# Altium PCB initial.PcbDoc
Units mil, origin at the board's own origin, x right, y up, seen from the top; angles counter-clockwise.
Board outline 6000 x 4000 mil, 2 copper layers (Top Layer, Bottom Layer); 25 components, 40 nets, 159 pads, 0 vias.
Unrouted connection lines stored in the file: 90.
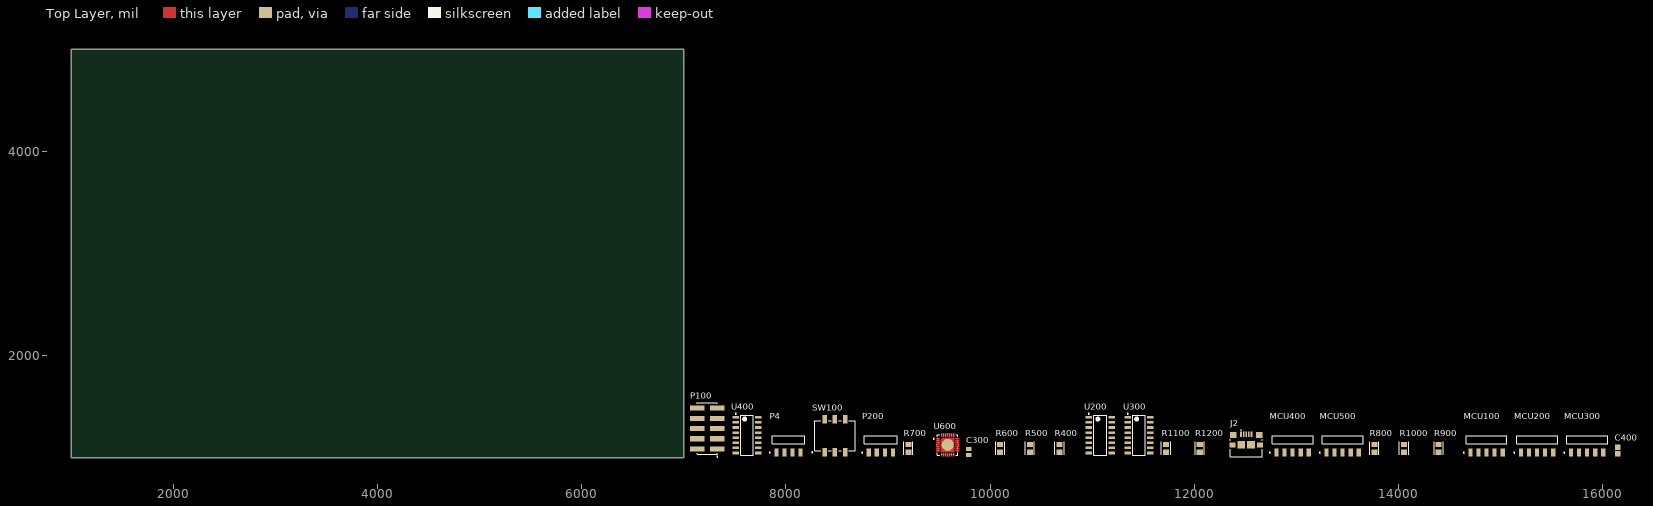
[diagram p0: Top Layer view]
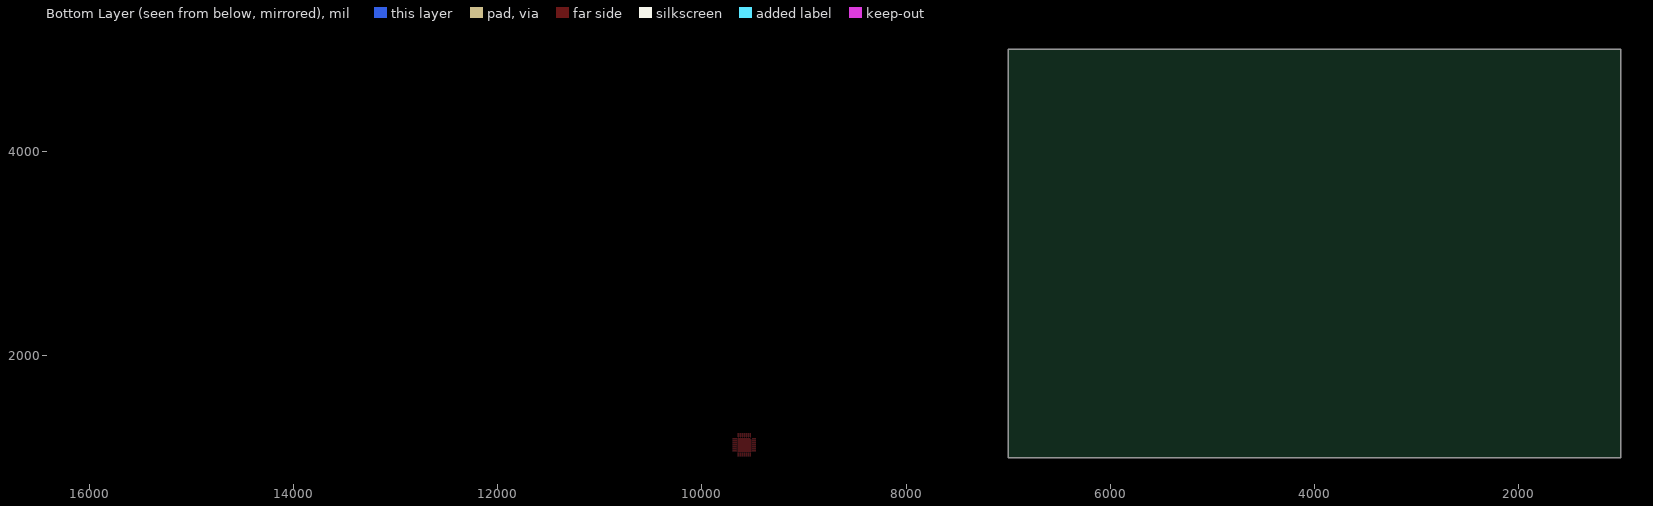
[diagram p1: Bottom Layer view, seen from below]

## Layer stack, top to bottom
Top Solder: solder mask 0.4, Solder Resist, Dk 3.5
Top Layer: signal copper 1.4
Dielectric 1: dielectric 12.6, FR-4, Dk 4.8
Bottom Layer: signal copper 1.4
Bottom Solder: solder mask 0.4, Solder Resist, Dk 3.5

## Board outline
1000,1000 7000,1000 7000,5000 1000,5000

## Design rules (kind name [scope] priority, off if disabled: settings)
Clearance [All] p1: gap=10 ignorepadtopadclearanceinfootprint=FALSE
PolygonConnect [All] p1: connectstyle=Relief reliefconductorwidth=10 reliefentries=4 polygonreliefangle="90 Angle" airgapwidth=10
RoutingVias [All] p1: holewidth=28 width=50 viastyle="Through Hole" minholewidth=28 minwidth=50 maxholewidth=28 maxwidth=50
SolderMaskExpansion [All] p1: expansion=4 istentingtop=FALSE
SupplyNets "Schematic Supply Nets_3" [InNet('+5V')] p1: voltage=0.000
SupplyNets "Schematic Supply Nets_2" [InNet('+5')] p2: voltage=0.000
SupplyNets "Schematic Supply Nets_1" [InNet('+3.3V')] p3: voltage=0.000
SupplyNets "Schematic Supply Nets" [InNet('GND')] p4: voltage=0.000
Width [All] p1: maxlimit=10 minlimit=10 preferedwidth=10
30 further rules are at their usual default settings.

## Components (designator, comment, footprint, x,y, rotation, side; value= is the part's Value field where it differs from the comment)
C300 "100nF" CAPC2013X135X50LL15T20 9790,1055 r90 top
C400 "1uF" CAPC2013X140X50NL20T25 16150,1070 r90 top
J2 "1981568-1" TECO-1981568-5_V 12510,1230 r0 top
MCU100 "MMT-105-01-T-SH" SMTC-MMT-105-01-X-SH 14865,1175 r0 top
MCU200 "MMT-105-01-T-SH" SMTC-MMT-105-01-X-SH 15360,1175 r0 top
MCU300 "MMT-105-01-T-SH" SMTC-MMT-105-01-X-SH 15850,1175 r0 top
MCU400 "MMT-105-01-T-SH" SMTC-MMT-105-01-X-SH 12965,1175 r0 top
MCU500 "MMT-105-01-T-SH" SMTC-MMT-105-01-X-SH 13455,1175 r0 top
P4 "MMT-104-01-T-SH" SMTC-MMT-104-01-X-SH 8025,1175 r0 top
P100 "TSM-105-01-L-DV" SMTC-TSM-105-01-X-DV 7230,1285 r90 top
P200 "MMT-104-01-T-SH" SMTC-MMT-104-01-X-SH 8930,1175 r0 top
R400 "10k" FP-CRGP0805-IPC_A 10680,1090 r90 top value=10KΩ
R500 "10k" FP-CRGP0805-IPC_A 10390,1090 r90 top value=10KΩ
R600 "10k" FP-CRGP0805-IPC_A 10100,1090 r90 top value=10KΩ
R700 "10k" FP-CRGP0805-IPC_A 9200,1090 r90 top value=10KΩ
R800 "10k" FP-CRGP0805-IPC_A 13765,1090 r90 top value=10KΩ
R900 "10k" FP-CRGP0805-IPC_A 14395,1090 r90 top value=10KΩ
R1000 "10k" FP-CRGP0805-IPC_A 14055,1090 r90 top value=10KΩ
R1100 "10k" FP-CRGP0805-IPC_A 11725,1090 r90 top value=10KΩ
R1200 "10k" FP-CRGP0805-IPC_A 12055,1090 r90 top value=10KΩ
SW100 "A6SN-3101" FP-A6SN-3101-MFG 8480,1215 r0 top
U200 "CD74HC4051M96" D0016A_M 11080,1220 r0 top
U300 "CD74HC4051M96" D0016A_M 11460,1220 r0 top
U400 "CD74HC4051M96" D0016A_M 7620,1220 r0 top
U600 "CP2102N-A02-GQFN28" FP-CP2102N-A02-GQFN28-MFG 9585,1125 r0 top

## Footprints (in the part's own frame and the unit in brackets; to place one, negate y for a bottom-side part, rotate by r counter-clockwise, add the part's x,y. Pads: shape width x height; smd on the part's side, far side on the other; paste and mask are expansions set on the pad)
CAPC2013X135X50LL15T20 [mm] "Chip Capacitor, 2-Leads, Body 2.00x1.25mm, IPC High Density"
  rect 1.05x1.35 smd: 1(-0.75,0) 2(0.75,0)
  body extent -1.08,-0.7 1.07,0.7, height 1.35
CAPC2013X140X50NL20T25 [mm] "Chip Capacitor, 2-Leads, Body 2.00x1.25mm, IPC Medium Density"
  rect 1.3x1.45 smd: 1(-0.8,0) 2(0.8,0)
  body extent -1.1,-0.72 1.1,0.72, height 1.4
D0016A_M [mm] "SOIC, 16-Leads, Body 10x4mm, Pitch 1.27mm, IPC Low Density"
  rrect15% 1.65x0.65 smd: 1(-2.825,4.445) 2(-2.825,3.175) 3(-2.825,1.905) 4(-2.825,0.635) 5(-2.825,-0.635) 6(-2.825,-1.905) 7(-2.825,-3.175) 8(-2.825,-4.445) 9(2.825,-4.445) 10(2.825,-3.175) 11(2.825,-1.905) 12(2.825,-0.635) 13(2.825,0.635) 14(2.825,1.905) 15(2.825,3.175) 16(2.825,4.445)
  silkscreen extent -2.95,-5 1.6,5.44, body extent -3,-4.95 3,4.95, height 1.59
FP-A6SN-3101-MFG [mm]
  rect 1.1x2.15 smd paste+0 mask+0: 1(-2.54,-4.125) 2(0,-4.125) 3(2.54,-4.125) 4(2.54,4.125) 5(0,4.125) 6(-2.54,4.125)
  silkscreen extent -5.77,-4.25 5.05,3.75, body extent -5.15,-5.3 5.15,5.3, height 0.25
FP-CP2102N-A02-GQFN28-MFG [mm]
  round 0.27 smd paste+0 mask+0: 1(-2.4,1.5) 2(-2.4,1) 3(-2.4,0.5) 4(-2.725,0) 5(-2.4,-0.5) 6(-2.4,-1) 7(-2.4,-1.5) 8(-1.5,-2.4) 9(-1,-2.4) 10(-0.5,-2.4) 11(0,-2.725) 12(0.5,-2.4) 13(1,-2.4) 14(1.5,-2.4) 15(2.4,-1.5) 16(2.4,-1) 17(2.4,-0.5) 18(2.675,0) 19(2.4,0.5) 20(2.4,1) 21(2.4,1.5) 22(1.5,2.4) 23(1,2.4) 24(0.5,2.4) 25(0,2.675) 26(-0.5,2.4) 27(-1,2.4) 28(-1.5,2.4)
  round 3.015 smd paste-1000 mask+0: 29(0,0)
  Top Layer region: -1.675,1.325 -1.325,1.675 1.675,1.675 1.675,-1.675 -1.675,-1.675 -1.675,1.325
  Top Layer region: -1.35,2.875 -1.35,2.075 -1.361,2.018 -1.394,1.969 -1.443,1.936 -1.5,1.925 -1.5,1.925 -1.557,1.936 -1.606,1.969 -1.639,2.018 -1.65,2.075 -1.65,2.075 -1.65,2.875
  Top Layer region: -0.85,2.875 -0.85,2.075 -0.861,2.018 -0.894,1.969 -0.943,1.936 -1,1.925 -1,1.925 -1.057,1.936 -1.106,1.969 -1.139,2.018 -1.15,2.075 -1.15,2.075 -1.15,2.875
  Top Layer region: -0.35,2.875 -0.35,2.075 -0.361,2.018 -0.394,1.969 -0.443,1.936 -0.5,1.925 -0.5,1.925 -0.557,1.936 -0.606,1.969 -0.639,2.018 -0.65,2.075 -0.65,2.075 -0.65,2.875
  Top Layer region: 0.15,2.875 0.15,2.075 0.139,2.018 0.106,1.969 0.057,1.936 0,1.925 0,1.925 -0.057,1.936 -0.106,1.969 -0.139,2.018 -0.15,2.075 -0.15,2.075 -0.15,2.875
  Top Layer region: 0.65,2.875 0.65,2.075 0.639,2.018 0.606,1.969 0.557,1.936 0.5,1.925 0.5,1.925 0.443,1.936 0.394,1.969 0.361,2.018 0.35,2.075 0.35,2.075 0.35,2.875
  Top Layer region: 1.15,2.875 1.15,2.075 1.139,2.018 1.106,1.969 1.057,1.936 1,1.925 1,1.925 0.943,1.936 0.894,1.969 0.861,2.018 0.85,2.075 0.85,2.075 0.85,2.875
  Top Layer region: 1.65,2.875 1.65,2.075 1.639,2.018 1.606,1.969 1.557,1.936 1.5,1.925 1.5,1.925 1.443,1.936 1.394,1.969 1.361,2.018 1.35,2.075 1.35,2.075 1.35,2.875
  Top Layer region: 1.35,-2.875 1.35,-2.075 1.361,-2.018 1.394,-1.969 1.443,-1.936 1.5,-1.925 1.5,-1.925 1.557,-1.936 1.606,-1.969 1.639,-2.018 1.65,-2.075 1.65,-2.075 1.65,-2.875
  Top Layer region: 0.85,-2.875 0.85,-2.075 0.861,-2.018 0.894,-1.969 0.943,-1.936 1,-1.925 1,-1.925 1.057,-1.936 1.106,-1.969 1.139,-2.018 1.15,-2.075 1.15,-2.075 1.15,-2.875
  Top Layer region: 0.35,-2.875 0.35,-2.075 0.361,-2.018 0.394,-1.969 0.443,-1.936 0.5,-1.925 0.5,-1.925 0.557,-1.936 0.606,-1.969 0.639,-2.018 0.65,-2.075 0.65,-2.075 0.65,-2.875
  Top Layer region: -0.15,-2.875 -0.15,-2.075 -0.139,-2.018 -0.106,-1.969 -0.057,-1.936 0,-1.925 0,-1.925 0.057,-1.936 0.106,-1.969 0.139,-2.018 0.15,-2.075 0.15,-2.075 0.15,-2.875
  Top Layer region: -0.65,-2.875 -0.65,-2.075 -0.639,-2.018 -0.606,-1.969 -0.557,-1.936 -0.5,-1.925 -0.5,-1.925 -0.443,-1.936 -0.394,-1.969 -0.361,-2.018 -0.35,-2.075 -0.35,-2.075 -0.35,-2.875
  Top Layer region: -1.15,-2.875 -1.15,-2.075 -1.139,-2.018 -1.106,-1.969 -1.057,-1.936 -1,-1.925 -1,-1.925 -0.943,-1.936 -0.894,-1.969 -0.861,-2.018 -0.85,-2.075 -0.85,-2.075 -0.85,-2.875
  Top Layer region: -1.65,-2.875 -1.65,-2.075 -1.639,-2.018 -1.606,-1.969 -1.557,-1.936 -1.5,-1.925 -1.5,-1.925 -1.443,-1.936 -1.394,-1.969 -1.361,-2.018 -1.35,-2.075 -1.35,-2.075 -1.35,-2.875
  Top Layer region: 2.875,1.35 2.075,1.35 2.018,1.361 1.969,1.394 1.936,1.443 1.925,1.5 1.925,1.5 1.936,1.557 1.969,1.606 2.018,1.639 2.075,1.65 2.075,1.65 2.875,1.65
  Top Layer region: 2.875,0.85 2.075,0.85 2.018,0.861 1.969,0.894 1.936,0.943 1.925,1 1.925,1 1.936,1.057 1.969,1.106 2.018,1.139 2.075,1.15 2.075,1.15 2.875,1.15
  Top Layer region: 2.875,0.35 2.075,0.35 2.018,0.361 1.969,0.394 1.936,0.443 1.925,0.5 1.925,0.5 1.936,0.557 1.969,0.606 2.018,0.639 2.075,0.65 2.075,0.65 2.875,0.65
  Top Layer region: 2.875,-0.15 2.075,-0.15 2.018,-0.139 1.969,-0.106 1.936,-0.057 1.925,0 1.925,0 1.936,0.057 1.969,0.106 2.018,0.139 2.075,0.15 2.075,0.15 2.875,0.15
  Top Layer region: 2.875,-0.65 2.075,-0.65 2.018,-0.639 1.969,-0.606 1.936,-0.557 1.925,-0.5 1.925,-0.5 1.936,-0.443 1.969,-0.394 2.018,-0.361 2.075,-0.35 2.075,-0.35 2.875,-0.35
  Top Layer region: 2.875,-1.15 2.075,-1.15 2.018,-1.139 1.969,-1.106 1.936,-1.057 1.925,-1 1.925,-1 1.936,-0.943 1.969,-0.894 2.018,-0.861 2.075,-0.85 2.075,-0.85 2.875,-0.85
  Top Layer region: 2.875,-1.65 2.075,-1.65 2.018,-1.639 1.969,-1.606 1.936,-1.557 1.925,-1.5 1.925,-1.5 1.936,-1.443 1.969,-1.394 2.018,-1.361 2.075,-1.35 2.075,-1.35 2.875,-1.35
  Top Layer region: -2.875,-1.35 -2.075,-1.35 -2.018,-1.361 -1.969,-1.394 -1.936,-1.443 -1.925,-1.5 -1.925,-1.5 -1.936,-1.557 -1.969,-1.606 -2.018,-1.639 -2.075,-1.65 -2.075,-1.65 -2.875,-1.65
  Top Layer region: -2.875,-0.85 -2.075,-0.85 -2.018,-0.861 -1.969,-0.894 -1.936,-0.943 -1.925,-1 -1.925,-1 -1.936,-1.057 -1.969,-1.106 -2.018,-1.139 -2.075,-1.15 -2.075,-1.15 -2.875,-1.15
  Top Layer region: -2.875,-0.35 -2.075,-0.35 -2.018,-0.361 -1.969,-0.394 -1.936,-0.443 -1.925,-0.5 -1.925,-0.5 -1.936,-0.557 -1.969,-0.606 -2.018,-0.639 -2.075,-0.65 -2.075,-0.65 -2.875,-0.65
  Top Layer region: -2.875,0.15 -2.075,0.15 -2.018,0.139 -1.969,0.106 -1.936,0.057 -1.925,0 -1.925,0 -1.936,-0.057 -1.969,-0.106 -2.018,-0.139 -2.075,-0.15 -2.075,-0.15 -2.875,-0.15
  Top Layer region: -2.875,0.65 -2.075,0.65 -2.018,0.639 -1.969,0.606 -1.936,0.557 -1.925,0.5 -1.925,0.5 -1.936,0.443 -1.969,0.394 -2.018,0.361 -2.075,0.35 -2.075,0.35 -2.875,0.35
  Top Layer region: -2.875,1.15 -2.075,1.15 -2.018,1.139 -1.969,1.106 -1.936,1.057 -1.925,1 -1.925,1 -1.936,0.943 -1.969,0.894 -2.018,0.861 -2.075,0.85 -2.075,0.85 -2.875,0.85
  Top Layer region: -2.875,1.65 -2.075,1.65 -2.018,1.639 -1.969,1.606 -1.936,1.557 -1.925,1.5 -1.925,1.5 -1.936,1.443 -1.969,1.394 -2.018,1.361 -2.075,1.35 -2.075,1.35 -2.875,1.35
  silkscreen extent -3.62,-2.55 2.55,2.55, body extent -2.98,-2.98 2.98,2.98, height 0.25
FP-CRGP0805-IPC_A [mil]
  rect 51.42x59.44 smd paste+0 mask+0: 1(-38.43,0) 2(38.43,0)
  silkscreen extent -64,-45 64,45, body extent -84,-49 84,49, height 10
SMTC-MMT-104-01-X-SH [mm] "Terminal Surface Mount Strip ASSEM, 1x4 Pins, Horizontal, 2mm Pitch, Male"
  rect 1.02x2.03 smd: 1(-3,-3.181) 2(-1,-3.181) 3(1,-3.181) 4(3,-3.181)
  silkscreen extent -4.77,-3.31 4.06,0.99, body extent -4,-3.8 4,4.19, height 1.92
SMTC-MMT-105-01-X-SH [mm] "Terminal Surface Mount Strip ASSEM, 1x5 Pins, Horizontal, 2mm Pitch, Male"
  rect 1.02x2.03 smd: 1(-4,-3.181) 2(-2,-3.181) 3(0,-3.181) 4(2,-3.181) 5(4,-3.181)
  silkscreen extent -5.77,-3.31 5.06,0.99, body extent -5,-3.8 5,4.19, height 1.92
SMTC-TSM-105-01-X-DV [mm] "Double Row Gullwing ASM, 2x5 Pins, Vertical, 2.54mm Pitch, Male"
  rect 1.27x3.68 smd: 1(-5.08,-2.475) 2(-5.08,2.475) 3(-2.54,-2.475) 4(-2.54,2.475) 5(0,-2.475) 6(0,2.475) 7(2.54,-2.475) 8(2.54,2.475) 9(5.08,-2.475) 10(5.08,2.475)
  silkscreen extent -7.11,-2.67 6.35,2.54, body extent -6.35,-3.68 6.35,3.68, height 9.65
TECO-1981568-5_V [mm] "SMD, 5-Leads, Body 8x5.9mm, Pitch 0.65mm"
  rect 0.4x1.35 smd: 1(-1.3,0) 2(-0.65,0) 3(0,0) 4(0.65,0) 5(1.3,0)
  rect 1.6x1.4 smd: 6(-3.2,-0.225) 7(3.2,-0.225)
  rect 1.45x1.3 smd: 8(-3.425,-2.675) 9(3.425,-2.675)
  rect 1.9x1.9 smd: 10(-1.2,-2.675) 11(1.2,-2.675)
  silkscreen extent -4,-5.63 4,1.12, body extent -4,-5.63 4,0.28, height 3

## Part data
C300: library part CMP-2007-03441-1, Manufacturer=Vitramon, Part Number=VJ0805Y104KXJCW1BC
C400: library part CMP-2007-04663-1, Manufacturer="AVX Interconnect / Elco", Part Number=0805YD105MAT2A
J2: library part CMP-2000-05408-1, "Micro USB Receptacle Standard Type B Assy, 5-Pin SMD, RoHS, Tape and Reel", Current Rating (Max)=1/ContactA, Manufacturer="TE Connectivity", Operating Temp Range=-55Cto85C, Operating Temperature Max Deg. C=85C, Operating Temperature Min Deg. C=-55C, Voltage Rating Max=30VAC, Body Orientation=RightAngle, Contact Material=CopperAlloy, Contact Plating=GoldOverNickel, Datasheet URL=http://www.mouser.com/ds/2/418/NG_CD_1981568_E2-621296.pdf, Datasheet Version="Rev. E2, 08/2015", Gender=RCP, Housing Material=Thermoplastic, Manufacturer URL=http://www.te.com/, Mounting Style=SurfaceMount, Number of Contacts=5POS, Number of Ports=1Port, Number of Terminals=5, Packaging=TapeandReel, Pitch (mm)=0.65mm, Product Depth (mm)=5.6mm, Product Height (mm)=3mm, Product Length (mm)=8mm, Termination Method=Solder, Type=MicroUSB
MCU100 MCU200 MCU300 MCU400 MCU500: library part CMP-1029-00060-1, "Horizontal Surface Mount Header, -55 to 105 degC, 2 mm Pitch, 5-Pin, Male, RoHS", Manufacturer=Samtec, Temperature Range="-55 to 105 degC", ComponentLink1Description="Manufacturer URL", ComponentLink1URL=http://www.samtec.com, ComponentLink2Description=Datasheet, ComponentLink2URL=http://d2a072wq521u33.cloudfront.net/catalog_english//MMT_SM.PDF, ComponentLink3Description="Package Specification", ComponentLink3URL=http://www.samtec.com/documents/webfiles/cpdf/MMT-1XX-XX-XX-XX-XX-XXX-X-XX-MKT.pdf, DatasheetVersion=F-214, Mounting Technology="Surface Mount", Orientation=Horizontal, PackageDescription="2mm Horizontal Terminal Surface Mount Strip ASSEM", PackageReference=MMT-105-01-X-SH, PackageVersion="CY, 12/2000", PartNumber=MMT-105-01-T-SH, Pitch="2 mm", RoHS=True
P4 P200: library part CMP-1029-00049-1, "Horizontal Surface Mount Header, -55 to 105 degC, 2 mm Pitch, 4-Pin, Male, RoHS", Manufacturer=Samtec, Temperature Range="-55 to 105 degC", ComponentLink1Description="Manufacturer URL", ComponentLink1URL=http://www.samtec.com, ComponentLink2Description=Datasheet, ComponentLink2URL=http://d2a072wq521u33.cloudfront.net/catalog_english//MMT_SM.PDF, ComponentLink3Description="Package Specification", ComponentLink3URL=http://www.samtec.com/documents/webfiles/cpdf/MMT-1XX-XX-XX-XX-XX-XXX-X-XX-MKT.pdf, DatasheetVersion=F-214, Mounting Technology="Surface Mount", Orientation=Horizontal, PackageDescription="2mm Horizontal Terminal Surface Mount Strip ASSEM", PackageReference=MMT-104-01-X-SH, PackageVersion="CY, 12/2000", PartNumber=MMT-104-01-T-SH, Pitch="2 mm", RoHS=True
P100: library part CMP-1024-00233-1, "0.025\" SQ Post Header, Surface Mount, Vertical, -55 to 125 degC, 2.54 mm Pitch, 10-Pin, Male, RoHS", Manufacturer=Samtec, Temperature Range="-55 to 125 degC", ComponentLink1Description="Manufacturer URL", ComponentLink1URL=http://www.samtec.com, ComponentLink2Description=Datasheet, ComponentLink2URL=http://www.samtec.com/documents/webfiles/pdf/TSM.PDF, ComponentLink3Description="Package Specification", ComponentLink3URL=http://www.samtec.com/documents/webfiles/cpdf/TSM-1XX-XX-XXX-XX-X-XXX-X-MKT.pdf, DatasheetVersion=F-214, Mounting Technology="Surface Mount", Orientation=Vertical, PackageDescription="Double Row Gullwing ASM", PackageReference=TSM-105-01-X-DV, PackageVersion="DJ, 4/1991", PartNumber=TSM-105-01-L-DV, Pitch="2.54 mm", RoHS=True
R400 R500 R600 R700 R800 R900 R1000 R1100 R1200: library part CMP-03211-006861-1, "CRGP 0805 10K 1%", Ambient Temperature Range High=+70°C, Manufacturer=TE, Manufacturer Part Number=CRGP0805F10K, Package=CRGP0805, Power Rating=0.33W, Resistance=10KΩ, Temperature="-55°C to +155°C", Temperature Coefficient=±100ppm/°C, Temperature Range High=+155°C, Temperature Range Low=-55°C, Tolerance=0.01, Voltage Rating=150V, Automotive=No, Category=Res, ComponentLink2Description=Datasheet, ComponentLink2URL=https://www.mouser.com/datasheet/2/418/NG_DS_9-1773463-9_A-1358566.pdf, Composition="Thick Film", Device Class L1="Passive Components", Device Class L2=Resistors, Device Class L3="Chip SMD Resistors", Digikey Description="CRGP 0805 10K 1%", Height=0.65mm, Ipc Land Pattern Name=RESC200125X55, Lead Free=Yes, Octopart=https://octopart.com/crgp0805f10k-te+connectivity-91018782, RoHS=TRUE, Series=CRGP
SW100: library part CMP-08827-000007-1, "SWITCH SLIDE DIP SPST 25MA 24V", Ambient Temperature Range High=+85°C, Ambient Temperature Range Low=-30°C, Contact Resistance=200mΩ, Current Rating=25mA, Manufacturer="Omron Electronics Inc-EMC Div", Temperature="-30°C to +85°C", Voltage Rating Dc=24V, Automotive=No, Category=Switch, ComponentLink2Description=Datasheet, ComponentLink2URL=https://omronfs.omron.com/en_US/ecb/products/pdf/en-a6sn.pdf, Device Class L1=Electromechanical, Device Class L2=Switches, Device Class L3="DIP Switches", Digikey Description="SWITCH SLIDE DIP SPST 25MA 24V", Electromechanical Life=1000Cycles, Height=4.55mm, Lead Free=Yes, Manufacturer Part Number=A6SN-3101, Mouser Description="DIP Switches / SIP Switches 3P Knife-Edge, 2.3mm Slide SMT Flat-Act", Number Of Circuits=3, Octopart=https://octopart.com/a6sn-3101-omron-55396000, Package=A6SN-3101, RoHS=TRUE, Standoff Height=0.7mm, Temperature Range High=+85°C, Temperature Range Low=-30°C, Throw Configuration=SPST
U200 U300 U400: library part CMP-1575-00036-4, "High Speed CMOS 8-Channel Analog Multiplexer/Demultiplexer, D0016A, LARGE T&R", Generic Part Number=CD74HC4051, Manufacturer="Texas Instruments", Operating Temperature Range(C)="-55 to 125", Rating=Catalog, Bandwidth(Max)(MHz)=180, Code_JEDEC="MS-012 variation AC", Configuration="1 X 1：8 MUX", Crosstalk=Yes, DatasheetVersion=SCHS122J, Output Type=CMOS, PackageReference=D0016A, PackageVersion=http://www.ti.com/lit/ml/mpds178g/mpds178g.pdf, Ron(Max)(Ohms)=130, Ron(Typ)(Ohms)=45, VCC(Max)(V)=6, VCC(Min)(V)=2
U600: library part CMP-08093-000005-1, "IC USB TO UART BRIDGE QFN28"

## Nets (pads, with @x,y where several pads share a name; then routed paths per layer and width w, separated by ;. In a path a pad name is that pad's centre, name@x,y a point inside that pad or via, vN(x,y) a via of type N, cw(c..) or ccw(c..) an arc to the next point about the centre after c; other vN are vias at no path point)
+3.3V: C300.1 C400.2 MCU100.4 MCU200.4 MCU300.4 MCU400.4 MCU500.4 P4.3 P100.1 P200.3 R700.1 R800.1 R900.2 R1100.1 R1200.1 SW100.4 SW100.5 SW100.6 U200.16 U300.16 U400.16 U600.6
+5V: 
+5V_(2): J2.1 U600.7
A_U2: P100.2 U200.3
A_U3: P100.4 U300.3
A_U4: P100.10 U400.3
D+: J2.3 U600.5
D-: J2.2 U600.4
ESP_IN: P200.2
ESP_OUT: P200.1
GND: C300.2 C400.1 J2.5 J2.6 J2.7 J2.8 J2.9 J2.10 J2.11 MCU100.5 MCU200.5 MCU300.5 MCU400.5 MCU500.5 P4.4 P100.3 P100.5 P100.9 P200.4 R400.2 R500.2 R600.2 R1000.1 U200.6 U200.7 U200.8 U300.6 U300.7 U300.8 U400.6 U400.7 U400.8 U600.3 U600.29
NetD100_A: 
NetJ100_A5: 
NetJ100_B5: 
NetR700_2: R700.2 U600.9
NetR800_2: R800.2
NetR900_1: R900.1
NetR1000_2: R1000.2
NetR1100_2: R1100.2
NetR1200_2: R1200.2
NRST_1: MCU100.3 U400.13
NRST_2: MCU200.3 U400.14
NRST_3: MCU300.3 U400.15
NRST_4: MCU400.3 U400.12
NRST_5: MCU500.3 U400.1
PC_IN: P4.2 U600.26
PC_OUT: P4.1 U600.25
S0_CTRL: R400.1 SW100.1 U200.11 U300.11 U400.11
S1_CTRL: R500.1 SW100.2 U200.10 U300.10 U400.10
S2_CTRL: R600.1 SW100.3 U200.9 U300.9 U400.9
SWCLK_1: MCU100.2 U300.13
SWCLK_2: MCU200.2 U300.14
SWCLK_3: MCU300.2 U300.15
SWCLK_4: MCU400.2 U300.12
SWCLK_5: MCU500.2 U300.1
SWDIO_1: MCU100.1 U200.13
SWDIO_2: MCU200.1 U200.14
SWDIO_3: MCU300.1 U200.15
SWDIO_4: MCU400.1 U200.12
SWDIO_5: MCU500.1 U200.1
pads on no net: J2.4 P100.6 P100.7 P100.8 U200.2 U200.4 U200.5 U300.2 U300.4 U300.5 U400.2 U400.4 U400.5 U600.1 U600.2 U600.8 U600.10 U600.11 U600.12 U600.13 U600.14 U600.15 U600.16 U600.17 U600.18 U600.19 U600.20 U600.21 U600.22 U600.23 U600.24 U600.27 U600.28